# Altium PCB 555LEDBLINK.PcbDoc
Units mil, origin at the board's own origin, x right, y up, seen from the top; angles counter-clockwise.
Board outline 1250 x 1900 mil, 2 copper layers (Top Layer, Bottom Layer); 9 components, 7 nets, 24 pads, 4 vias.
Unrouted connection lines stored in the file: 1.
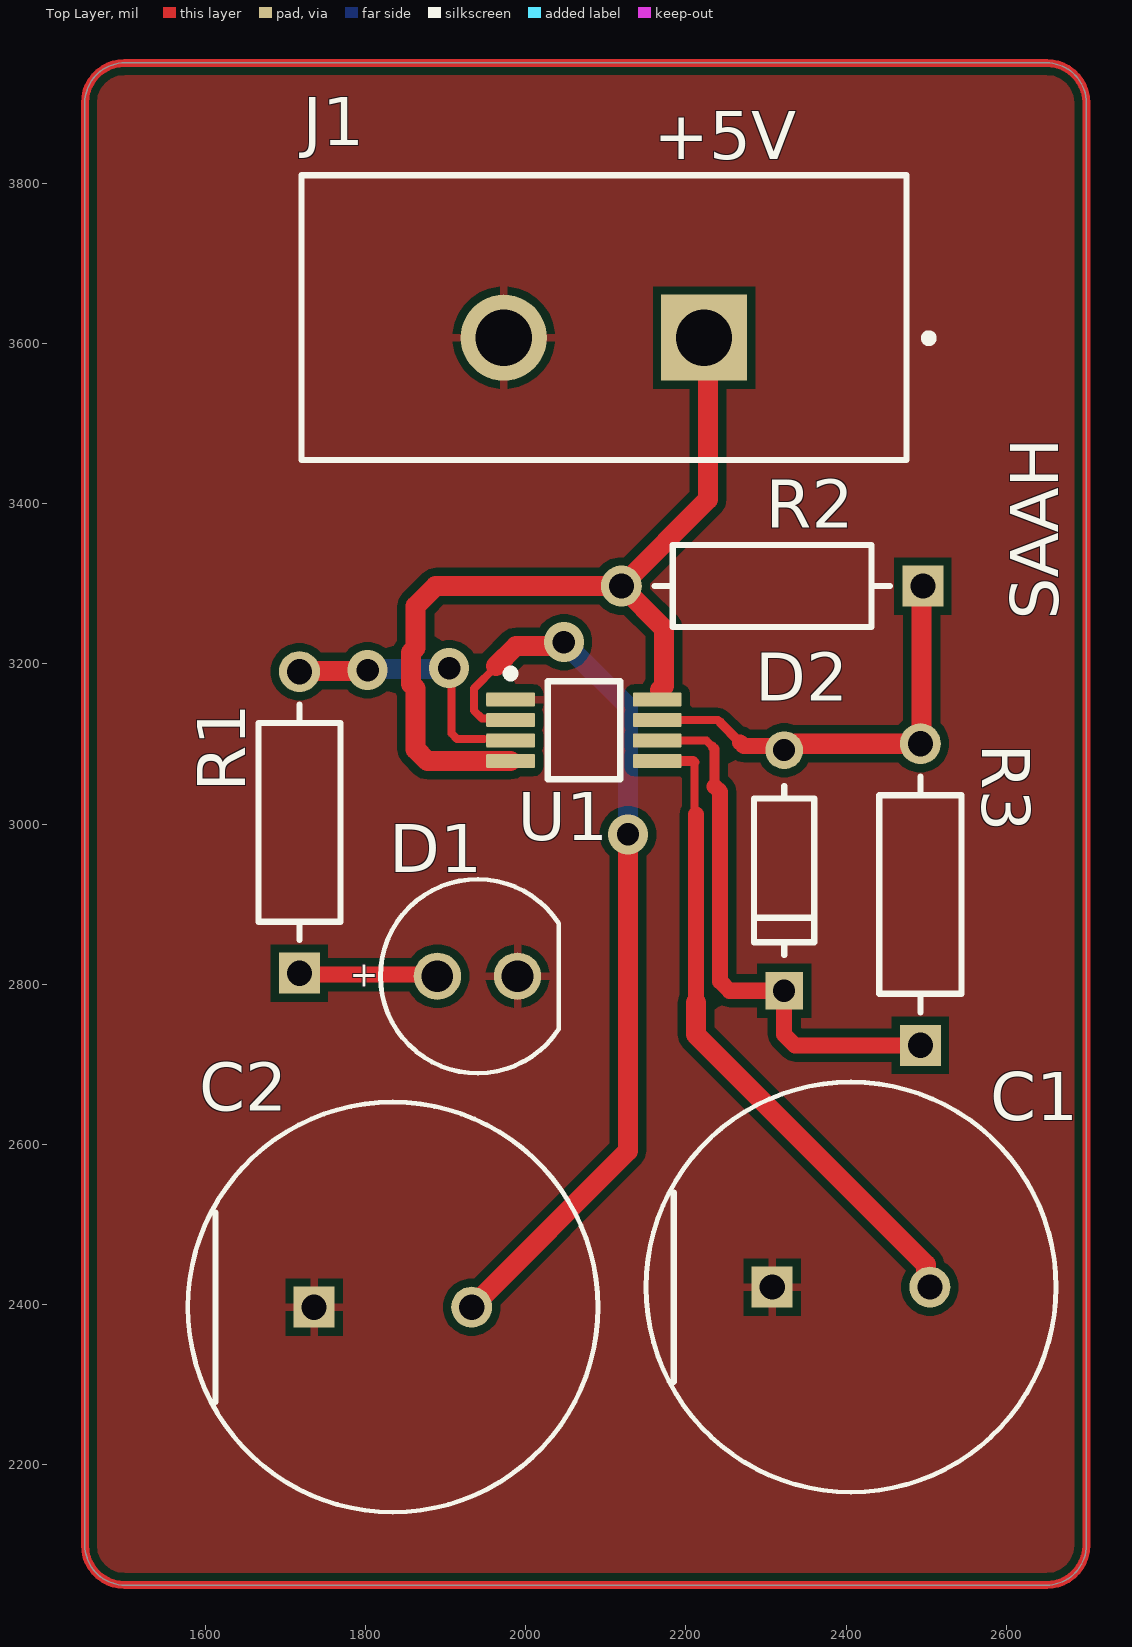
[diagram p0: Top Layer view]
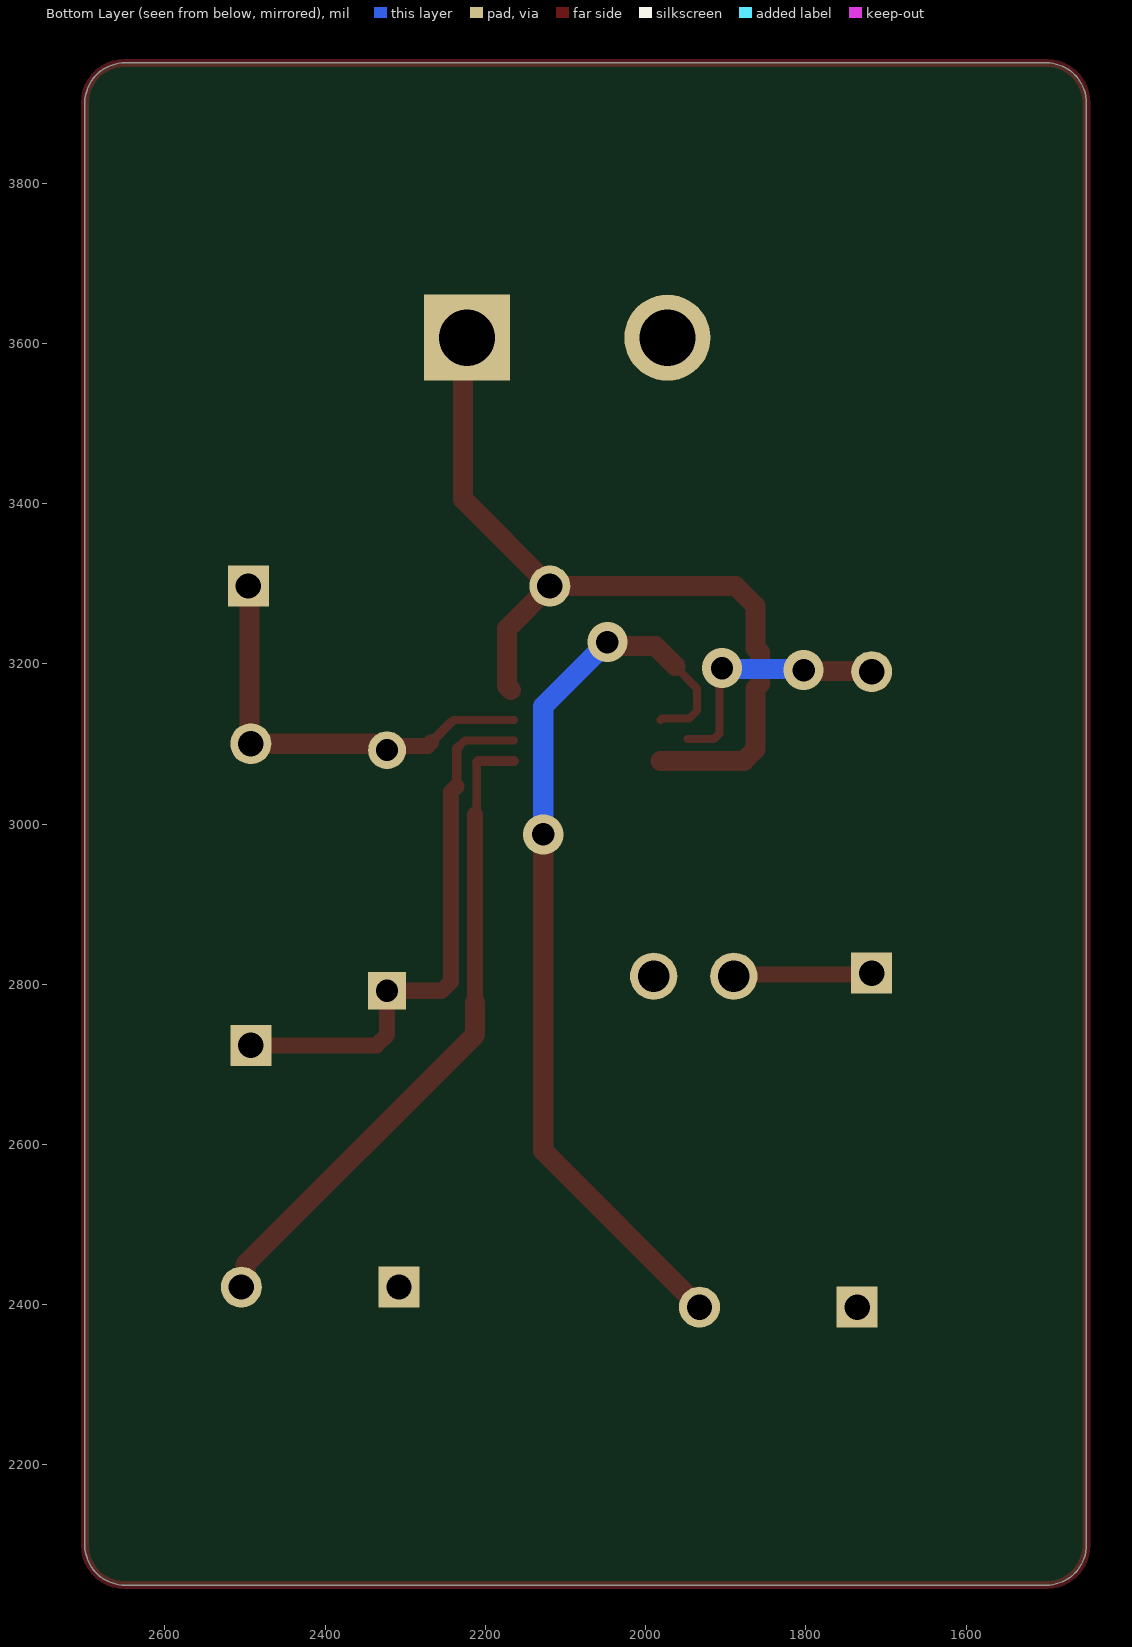
[diagram p1: Bottom Layer view, seen from below]
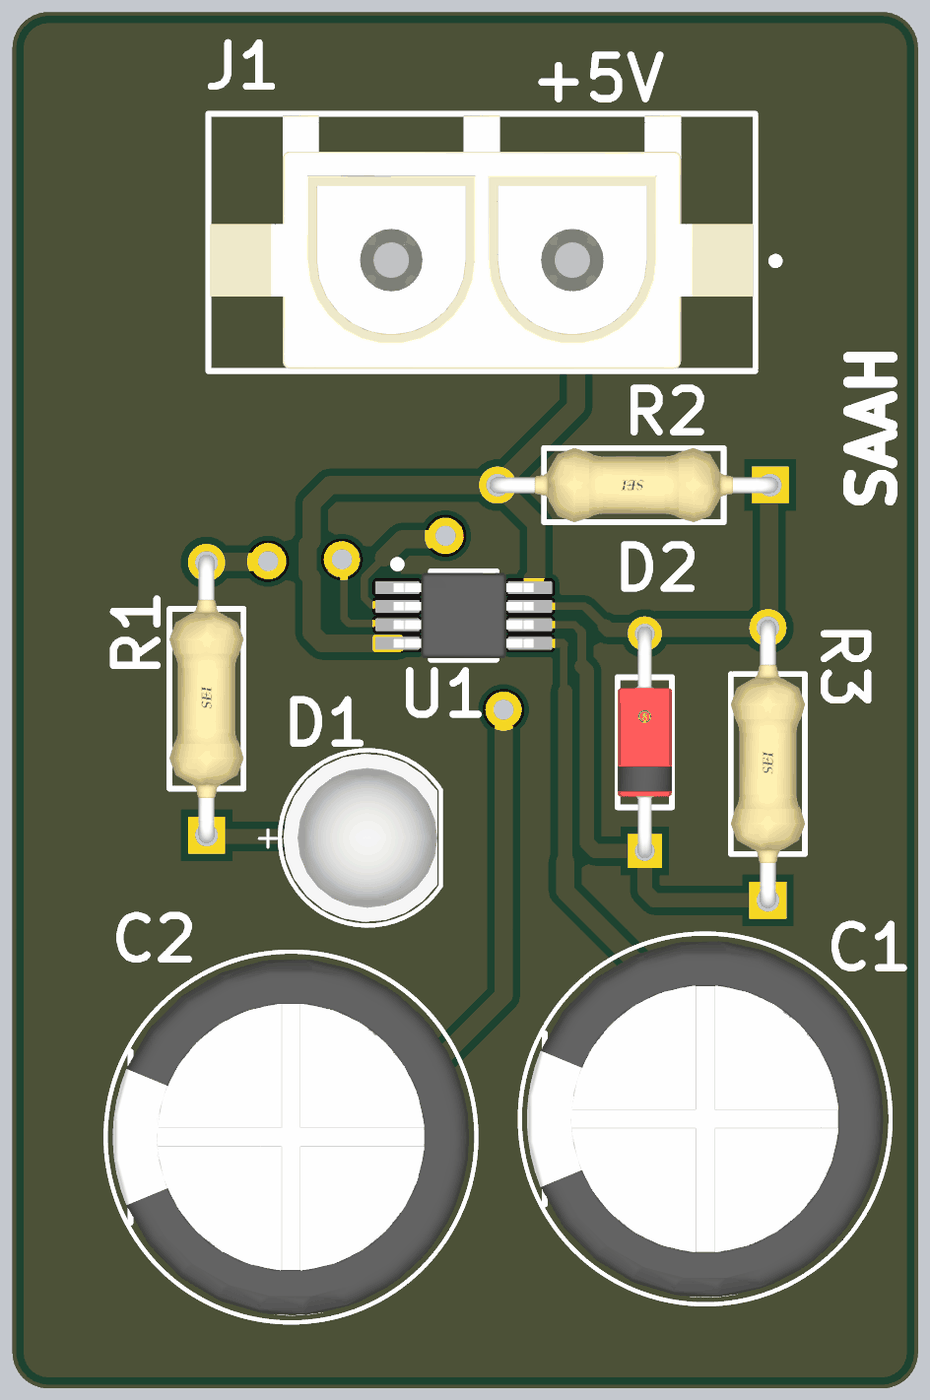
[diagram p2: 3D render of the assembled board from above, using the file's embedded part models]

## Layer stack, top to bottom
Top Solder: solder mask 0.4, Solder Resist, Dk 3.5
Top Layer: signal copper 1.4
Dielectric 1: dielectric 12.6, FR-4, Dk 4.8
Bottom Layer: signal copper 1.4
Bottom Solder: solder mask 0.4, Solder Resist, Dk 3.5

## Board outline
1450,2100 1450,3900 cw(c1500,3900) 1500,3950 2650,3950 cw(c2650,3900) 2700,3900 2700,2100 cw(c2650,2100) 2650,2050 1500,2050 cw(c1500,2100)

## Design rules (kind name [scope] priority, off if disabled: settings)
Clearance [All] p1: gap=10 ignorepadtopadclearanceinfootprint=FALSE
PolygonConnect [All] p1: connectstyle=Relief reliefconductorwidth=10 reliefentries=4 polygonreliefangle="90 Angle" airgapwidth=10
RoutingVias [All] p1: holewidth=28 width=50 viastyle="Through Hole" minholewidth=28 minwidth=50 maxholewidth=28 maxwidth=50
SolderMaskExpansion [All] p1: expansion=4 istentingtop=FALSE
SupplyNets "Schematic Supply Nets" [InNet('GND')] p1: voltage=0.000
Width [All] p1: maxlimit=40 minlimit=10 preferedwidth=30 minimp=50.000000 maximp=50.000000 favimp=50.000000
30 further rules are at their usual default settings.

## Components (designator, comment, footprint, x,y, rotation, side; value= is the part's Value field where it differs from the comment)
C1 "10n" FP-RAD-TH-D_12_5_0_5-L_20-MFG 2406.29,2421.98 r0 top
C2 "10u" FP-RAD-TH-D_12_5_0_5-L_20-MFG 1834.44,2396.98 r0 top
D1 "LED" WL-TMRC_D5.9H8.7 1940,2810 r0 top
D2 "1N4148" FP-017AG-MFG 2322.87,2941.98 r90 top
J1 "350428-1" FP-350428-1-MFG 2097.87,3631.98 r180 top
R1 "1k" FP-CF14-MFG 1717.87,3001.98 r90 top
R2 "10K" FP-CF14-MFG 2307.87,3296.98 r180 top
R3 "100k" FP-CF14-MFG 2492.87,2911.98 r90 top
U1 "LM555CMMX/NOPB" DGK0008A_M 2072.87,3116.98 r0 top

## Footprints (in the part's own frame and the unit in brackets; to place one, negate y for a bottom-side part, rotate by r counter-clockwise, add the part's x,y. Pads: shape width x height; smd on the part's side, far side on the other; paste and mask are expansions set on the pad)
DGK0008A_M [mm] "TSOP, 8-Leads, Body 3.1x3.1mm, Pitch 0.65mm, IPC Low Density"
  rrect22% 1.55x0.45 smd: 1(-2.325,0.975) 2(-2.325,0.325) 3(-2.325,-0.325) 4(-2.325,-0.975) 5(2.325,-0.975) 6(2.325,-0.325) 7(2.325,0.325) 8(2.325,0.975)
  silkscreen extent -2.45,-1.55 1.15,1.92, body extent -2.45,-1.5 2.45,1.5, height 0.94
FP-017AG-MFG [mm]
  rect 1.2x1.2 hole 0.7 paste-2539.97 mask+0: 1(-3.813,0)
  round 1.2 hole 0.7 paste-2539.97 mask+0: 2(3.813,0)
  silkscreen extent -2.68,-0.95 2.68,0.95, body extent -4.51,-1.05 4.51,1.05, height 0.25
FP-350428-1-MFG [mm]
  rect 2.73x2.73 hole 1.78 paste-2539.97 mask+0: 1(-3.175,0.635)
  round 2.73 hole 1.78 paste-2539.97 mask+0: 2(3.175,0.635)
  silkscreen extent -10.43,-4.51 9.59,4.51, body extent -9.69,-4.61 9.69,4.61, height 0.25
FP-CF14-MFG [mm]
  rect 1.3x1.3 hole 0.8 paste-2539.97 mask+0: 1(-4.78,0)
  round 1.3 hole 0.8 paste-2539.97 mask+0: 2(4.78,0)
  silkscreen extent -3.73,-1.3 3.73,1.3, body extent -5.53,-1.4 5.53,1.4, height 0.25
FP-RAD-TH-D_12_5_0_5-L_20-MFG [mm]
  rect 1.3x1.3 hole 0.8 paste-2539.97 mask+0: 1(-2.5,0)
  round 1.3 hole 0.8 paste-2539.97 mask+0: 2(2.5,0)
  silkscreen extent -6.5,-6.5 6.5,6.5, body extent -6.6,-6.6 6.6,6.6, height 0.25
WL-TMRC_D5.9H8.7 [mm] "THT Mono-color Round Color LED, 2-leads"
  round 1.5 hole 1: 1(-1.27,0) 2(1.27,0)
  silkscreen extent -3.07,-3.07 2.58,3.08, body extent -2.95,-2.95 2.45,2.95, height 9.2

## Part data
C1 C2: library part CMP-05427-000380-1, "Aluminum Electrolytic Capacitors (Radial Lead Type) 10uF ±20% 450V", Capacitance=10uF, Case/Package=Radial, Leakage Current=280uA, Max Operating Temperature=105°C, Min Operating Temperature=-25°C, Package Quantity=200, Ripple Current=490mA, Tolerance=20%, Voltage=450V, Construction=RADIAL, Diameter=12.5mm, Dissipation Factor=0.24%, Height=20mm, Height - Seated (Max)=0.787inch, Lead Diameter=0.6mm, Lead Free="Lead Free", Lead Pitch=5mm, Length=20mm, Life (Hours)=10000Hour, Mount="Through Hole", Packaging=Bulk, Radiation Hardening=No, REACH SVHC="No SVHC", RoHS Compliant=Yes, Series=EE, Termination=Radial, Voltage Rating=450V, Voltage Rating (DC)=450V
D1: library part CMP-03913-71241449-1, "151051SS04000 WL-TMRC THT Mono-color Round Color", Forward Current=100mA, Forward Voltage=2.1V, Max Operating Temperature=85°C, Max Reverse Voltage (DC)=5V, Min Operating Temperature=-40°C, Dominant Wavelength=635nm, Height=8.6mm, Length=5mm, Luminous Intensity=250mcd, Mount="Through Hole", NexarPartId=71241449, Packaging=Bulk, Peak Wavelength=640nm, RoHS=Compliant, Viewing Angle=40°, Wavelength=635nm, Width=5mm
D2: library part CMP-07163-000046-1, "DIODE GEN PURP 100V 200MA DO35", Average Rectified Current=200mA, Capacitance=4pF, Case/Package=DO-35, Current=4A, Forward Current=300mA, Forward Voltage=1V, Max Forward Surge Current (Ifsm)=1A, Max Operating Temperature=175°C, Max Power Dissipation=500mW, Max Repetitive Reverse Voltage (Vrrm)=100V, Max Reverse Current=5uA, Min Operating Temperature=-65°C, Package Quantity=2000, Contact Plating=Tin, Current Rating=200mA, Diameter=1.91mm, Element Configuration=Single, Height=4.56mm, Lead Free="Lead Free", Length=4.56mm, Max Reverse Voltage (DC)=100V, Max Surge Current=4A, Mount="Through Hole", Number of Pins=2, Output Current=200mA, Outside Diameter=1.85mm, Packaging=Bulk, Peak Non-Repetitive Surge Current=4A, Polarity=Standard, Power Dissipation=500mW, Radiation Hardening=No, REACH SVHC="No SVHC", Recovery Time=4ns, Reverse Recovery Time=4ns, Reverse Voltage=100V, Series=-, Voltage=100V, Voltage Rating (DC)=100V, Weight=0.01lb, Width=1.91mm
J1: library part CMP-03369-000080-1, "CONN HEADER VERT 2POS 6.35MM", Current Rating=12A, Manufacturer="TE Connectivity", Temperature="-40°C to +105°C", Temperature Range High=+105°C, Temperature Range Low=-40°C, Voltage Rating=600V, Automotive=No, Category=Conn, ComponentLink2Description=Datasheet, ComponentLink2URL=https://www.te.com/commerce/DocumentDelivery/DDEController?Action=showdoc&DocId=Customer+Drawing%7F350428%7FY2%7Fpdf%7FEnglish%7FENG_CD_350428_Y2.pdf%7F350428-1, Conn Gender=Male, Conn Orientation=Vertical, Contact Material=Gold,Nickel, Device Class L1=Connectors, Device Class L2="Headers and Wire Housings", Device Class L3=unset, Digikey Description="CONN HEADER VERT 2POS 6.35MM", Height=14.99mm, Lead Free=Yes, Manufacturer Part Number=350428-1, Mouser Description="Connector, Soft Shell; Universal MATE-N-LOK; 2; Nylon; Natural; 19 A; 600 VAC", Number Of Contacts=2, Number Of Rows=1, Octopart=https://octopart.com/350428-1-te+connectivity-46505355, Package=350428-1, Pitch=6.35mm, RoHS=TRUE, Standoff Height=0.63mm
R1 R2 R3: library part CMP-26528-000003-1, "RES 7.5K OHM 1/4W 5% AXIAL", Case/Package=Axial, Max Operating Temperature=155°C, Max Power Dissipation=250mW, Min Operating Temperature=-55°C, Resistance=7.5kR, Resistor Type="Carbon Film", Temperature Coefficient=-400ppm/°C, Tolerance=5%, Contact Plating=Tin, Diameter=2.3mm, Features="Flame Retardant Coating", Lead Free="Lead Free", Length=0.256inch, Mount="Through Hole", Number of Terminations=2, Packaging="Tape and Reel", Power Rating=250mW, Radiation Hardening=No, RoHS Compliant=Yes, Series=CF
U1: library part CMP-0056-00155-3, "Timer, 8-pin Mini SOIC, Pb-Free", Manufacturer="Texas Instruments", PackageTopMarking=ZXTT*Z55, PowerWise=N, Code_JEDEC=MO-187-AA, ComponentLink1Description="Datasheet URL", ComponentLink1URL=http://www.ti.com/general/docs/lit/getliterature.tsp?genericPartNumber=LM555&fileType=pdf, CompType="Analog IC", PackageDescription="MINI SOIC, .118 x .118 x .034in, 8 Lead, .0256in Pitch", PackageReference=DGK0008A, PinCount=8, RoHS=N

## Via types
v1: diameter 50, hole 28, Top Layer to Bottom Layer, 4 vias

## Nets (pads, with @x,y where several pads share a name; then routed paths per layer and width w, separated by ;. In a path a pad name is that pad's centre, name@x,y a point inside that pad or via, vN(x,y) a via of type N, cw(c..) or ccw(c..) an arc to the next point about the centre after c; other vN are vias at no path point)
GND: C1.1 C2.1 D1.2 J1.2 U1.1
NetC1_2: C1.2 U1.5 | length 823.8
  Top Layer w10: 2210.87,3076.98 2210.87,3013.98 2212.87,3011.98
  Top Layer w12: U1.5 2209.25,3078.6 2210.87,3076.98
  Top Layer w20: 2212.87,2776.98 2212.87,3011.98
  Top Layer w25: 2212.87,2776.98 2212.87,2736.98 2499.71,2450.14 2499.71,2426.99 C1.2
NetC2_2: C2.2 D2.1 R3.1 U1.2 U1.6 | length 1842.6
  Top Layer w10: 1962.87,3196.98 1962.87,3196.35 1935.82,3169.3 1935.82,3141.44 1945.75,3131.51 1979.6,3131.51 U1.2 ; U1.6 2225.66,3104.19 2232.87,3096.98
  Top Layer w12: 2232.87,3096.98 2235.87,3093.98 2235.87,3046.98
  Top Layer w20: 2235.87,3046.98 2242.87,3039.98 2242.87,2803.58 2254.58,2791.87 D2.1 2322.87,2736.98 2336.06,2723.8 R3.1
  Top Layer w25: C2.2 2127.87,2591.98 v1(2127.87,2986.98) ; 1962.87,3196.98 1988.08,3222.2 2043.08,3222.2 v1(2047.87,3226.98)
  Bottom Layer w25: v1(2047.87,3226.98) 2127.87,3146.98 v1(2127.87,2986.98)
NetD1_1: D1.1 R1.1 | length 173.7
  Top Layer w20: R1.1 1719.76,2811.9 1888.11,2811.9 D1.1
NetD2_2: D2.2 R2.1 R3.2 U1.7 | length 545.5
  Top Layer w10: U1.7 2240.07,3129.78 2242.87,3126.98
  Top Layer w12: 2242.87,3126.98 2267.87,3101.98
  Top Layer w20: 2267.87,3101.98 2272.54,3097.32 2317.65,3097.32 D2.2
  Top Layer w25: D2.2 2328.89,3092.1 2336.96,3100.17 R3.2 2494.46,3101.77 2494.46,3295.39 R2.1
NetJ1_1: J1.1 R2.2 U1.4 U1.8 | length 1086.1
  Top Layer w25: U1.4 1877.51,3078.6 1862.87,3093.24 1862.87,3169.22 1857.26,3174.83 1857.26,3214.18 1862.87,3219.79 1862.87,3271.98 1887.87,3296.98 R2.2 ; 2167.87,3166.98 2172.87,3171.98 2172.87,3243.8 R2.2 ; J1.1 2227.87,3601.98 2227.87,3405.17 R2.2
NetR1_2: R1.2 U1.3 | length 314.4
  Top Layer w10: v1(1904.76,3194.51) 1907.87,3191.4 1907.87,3112.84 1914.61,3106.1 1947.87,3106.1
  Top Layer w25: R1.2 1718.77,3191.08 1801.96,3191.08 v1(1802.87,3191.98)
  Bottom Layer w25: v1(1802.87,3191.98) 1804.13,3193.24 1903.5,3193.24 v1(1904.76,3194.51)
copper on no net: | length 6214.2
  Top Layer w10: 1450,2100 ccw(c1500,2100) 1500,2050 2650,2050 ccw(c2650,2100) 2700,2100 2700,3900 ccw(c2650,3900) 2650,3950 1500,3950 ccw(c1500,3900) 1450,3900 1450,2400 1450,2100

## Polygon pours and split planes (outlines as drawn)
GND on Top Layer "GND_L01_P000" (solid, pour order 0): 1450,2100 1450,3900 cw(c1500,3900) 1500,3950 2650,3950 cw(c2650,3900) 2700,3900 2700,2100 cw(c2650,2100) 2650,2050 1500,2050 cw(c1500,2100)

## Silkscreen, mask and mechanical layers (free items; w line width, h text height)
Top Overlay:
  text "+5V" at 2160,3830 h60
  text "SAAH" at 2665,3255 h60 r90

## Text inside footprints (layer, text, board x,y; h text height)
D1: Top Overlay "+" at 1780.55,2797.01 h31.5